# EAGLE board turbo_new (EAGLE 7.6.0)
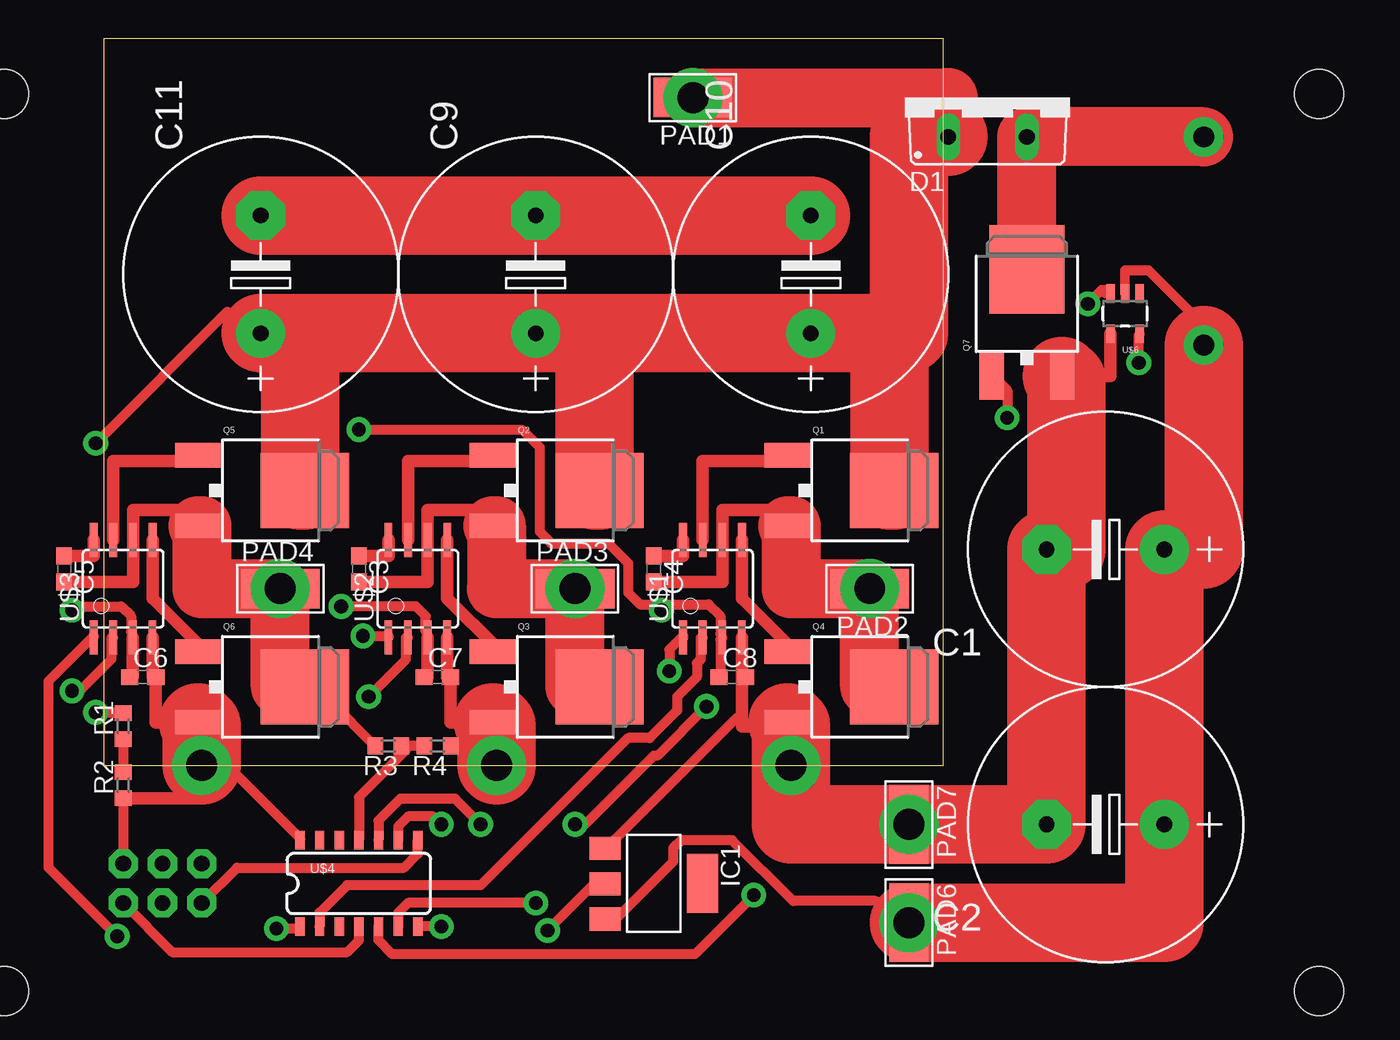
[diagram p0: board, top side]
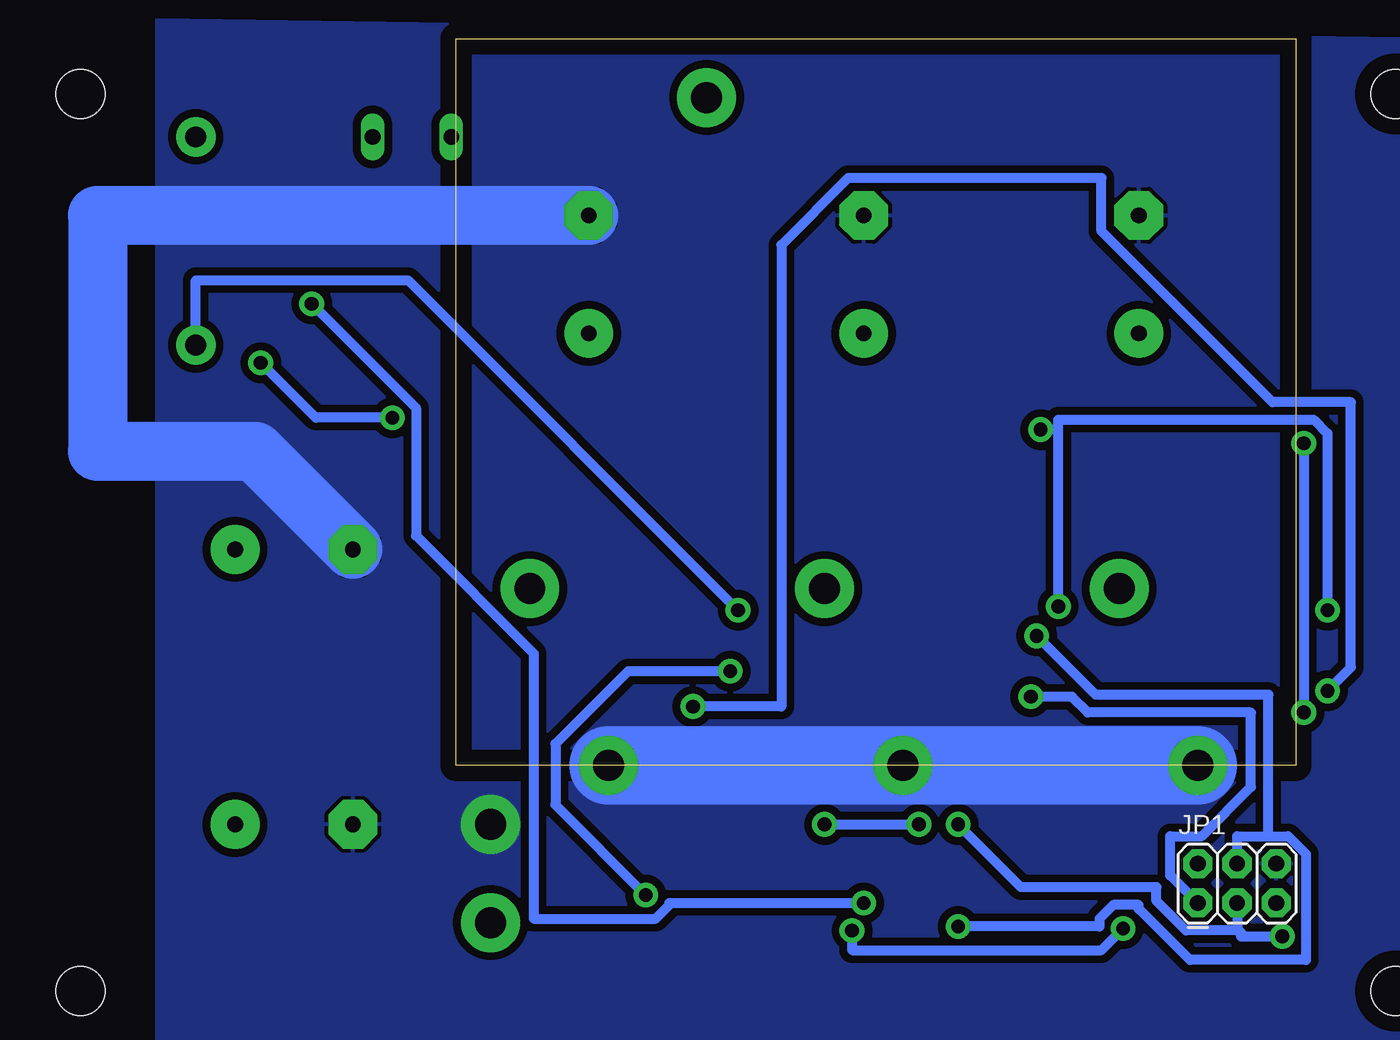
[diagram p1: board, bottom side, seen from below]

Size 54.28 x 46.98 mm. Coordinates in mm from the lower left corner, seen from the top.
Outline: 0,0 54.28,0 54.28,46.98 0,46.98 0,0
Copper layers (1*16): Top 0.035mm / dielectric 1.5mm / Bottom 0.035mm
Design rules "default *": minimum track width 20mil, minimum drill 35mil, track to track 20mil, track to pad 20mil, pad to pad 20mil, via to via 20mil, smd to smd 20mil, copper to edge 40mil, drill to drill 13mil, minimum pad ring 10mil, minimum via ring 8mil, stop-mask expansion 4mil, vias tented up to drill 0mil, thermal gap 10mil
Net classes: 0 default: width 0.635 mm
Holes 3.17 mm at -6.43,43.41 -6.43,-14.59 78.57,43.41 78.57,-14.59
vRestrict: area 12.1,-9.5 to 21,-5.7; area -1.3,8.9 to 3.8,14; area 17.8,8.9 to 22.9,14; area 36.8,8.9 to 41.9,14; area 45.7,14.6 to 52.1,21; area 26.7,14.6 to 33,21; area 26.7,1.9 to 33,8.3; area 45.7,1.9 to 52.1,8.3; area 7.6,1.9 to 14,8.3; area 33.7,-10.8 to 37.5,-4.4; area 64.8,28.6 to 67.3,29.8; area 56.5,26.7 to 62.9,33; 1 more areas

## Footprints (pad centres in the part's own frame; a part is rotated, then mirrored left to right if it is on the bottom)
E7,5-18 = drill 1.016 pad 3.15: + -3.81,0 | drill 1.016 pad 3.15 octagon: - 3.81,0
C0603 = smd 1.1 x 1: 1 -0.85,0; 2 0.85,0
TO220ACS = drill 1.016 long: A 2.54,-2.54; C -2.54,-2.54
SOT223 = smd 1.499 x 2.007: 1 -2.261,-3.15; 2 0.025,-3.15; 3 2.311,-3.15 | smd 3.81 x 2.007: 4 0,3.15
2X3 = drill 1.016 pad 1.88 octagon: 1 0,0; 2 0,2.54; 3 2.54,0; 4 2.54,2.54; 5 5.08,0; 6 5.08,2.54
5-2,5 = smd 2.54 x 5.08: 1 0,0
DPAK = smd 1.6 x 3: 1 -2.28,-5.31; 3 2.28,-5.31 | smd 4.826 x 5.715: 4 0,1.588
R0603 = smd 1 x 1.1: 1 -0.85,0; 2 0.85,0
SOIC8 = smd 0.5 x 2.2: 1 -1.905,-3.154; 2 -0.645,-3.154; 3 0.625,-3.154; 4 1.895,-3.154; 5 1.905,3.154; 6 0.635,3.154; 7 -0.635,3.154; 8 -1.905,3.154
SO14 = smd 0.6 x 1.2: 1 -3.81,-2.8; 2 -2.54,-2.8; 3 -1.27,-2.8; 4 0,-2.8; 5 1.27,-2.8; 6 2.54,-2.8; 7 3.81,-2.8; 8 3.81,2.8; 9 2.54,2.8; 10 1.27,2.8; 11 0,2.8; 12 -1.27,2.8; 13 -2.54,2.8; 14 -3.81,2.8
2310 = drill 1.346 pad 2.54: 1 0,0; 2 13.462,0
SOT23-5 = smd 0.55 x 1.2: 1 -0.95,-1.3; 2 0,-1.3; 3 0.95,-1.3; 4 0.95,1.3; 5 -0.95,1.3

## Placement (x,y rotation side)
C1  [E7,5-18]  64.77,13.97 180 top  (outside the outline)
C2  [E7,5-18]  64.77,-3.81 180 top  (outside the outline)
C3  0.1uf  [C0603]  16.51,12.7 270 top
C4  0.1uf  [C0603]  35.56,12.7 270 top
C5  0.1uf  [C0603]  -2.54,12.7 270 top
C6  0.1uf  [C0603]  2.54,5.71 0 top
C7  0.1uf  [C0603]  21.59,5.71 0 top
C8  0.1uf  [C0603]  40.64,5.71 0 top
C9  [E7,5-18]  27.94,31.75 90 top
C10  [E7,5-18]  45.72,31.75 90 top
C11  [E7,5-18]  10.16,31.75 90 top
D1  [TO220ACS]  57.15,43.18 0 top
IC1  REG1117  [SOT223]  35.56,-7.62 270 top  (outside the outline)
JP1  AVR_SPI_PRG_6PTH  [2X3]  6.35,-8.89 0 bottom  (outside the outline)
PAD1  [5-2,5]  38.1,43.18 90 top
PAD2  [5-2,5]  49.53,11.43 90 top
PAD3  [5-2,5]  30.48,11.43 270 top
PAD4  [5-2,5]  11.43,11.43 270 top
PAD6  [5-2,5]  52.07,-10.16 180 top  (outside the outline)
PAD7  [5-2,5]  52.07,-3.81 180 top  (outside the outline)
Q1  MOSFET-NCHANNELFDD8780  [DPAK]  49.53,17.78 270 top
Q2  MOSFET-NCHANNELFDD8780  [DPAK]  30.48,17.78 270 top
Q3  MOSFET-NCHANNELFDD8780  [DPAK]  30.48,5.08 270 top
Q4  MOSFET-NCHANNELFDD8780  [DPAK]  49.53,5.08 270 top
Q5  MOSFET-NCHANNELFDD8780  [DPAK]  11.43,17.78 270 top
Q6  MOSFET-NCHANNELFDD8780  [DPAK]  11.43,5.08 270 top
Q7  MOSFET-NCHANNELFDD8780  [DPAK]  59.69,30.48 0 top  (outside the outline)
R1  40k  [R0603]  1.27,2.54 90 top
R2  1k  [R0603]  1.27,-1.27 90 top
R3  20k  [R0603]  18.41,1.27 180 top
R4  1k  [R0603]  21.59,1.27 180 top
U$1  L6387  [SOIC8]  39.37,11.43 0 top
U$2  L6387  [SOIC8]  20.32,11.43 0 top
U$3  L6387  [SOIC8]  1.27,11.43 0 top
U$4  ATTINY84  [SO14]  16.51,-7.62 0 top  (outside the outline)
U$5  2310  [2310]  71.12,40.64 270 top  (outside the outline)
U$6  MCP1415  [SOT23-5]  66.04,29.21 180 top  (outside the outline)

## Library data of the parts
C1 C2 C9-C11 = adafruit
C3-C8 R1-R4 = rcl
D1 = diode
IC1 = burr-brown; MPN: REG1117; OC_FARNELL: 1097566; OC_NEWARK: 14P6981
JP1 = SparkFun-Connectors
PAD1-PAD4 PAD6 PAD7 = wirepad
Q1-Q7 = SparkFun-DiscreteSemi; PROD_ID: TRANS-09984
U$1-U$3 U$5 U$6 = TheLibrary
U$4 = SparkFun-DigitalIC; PROD_ID: IC-11285

## Nets
12V: C1.+ C2.+ C6.1 C7.1 C8.1 IC1.3 PAD6.1 U$1.3 U$2.3 U$3.3 U$5.2 U$6.2
48V: C9.+ C10.+ C11.+ D1.C PAD1.1 Q1.4 Q2.4 Q5.4 R1.2
A0: R1.1 R2.2
BOOST: U$4.6 U$6.3
EMF: C5.2 PAD4.1 Q5.3 Q6.4 R3.2 U$3.6
EMF_ADC: R3.1 R4.2 U$4.11
GND: C1.- C2.- C6.2 C7.2 C8.2 C9.- C10.- C11.- IC1.1 JP1.6 PAD7.1 Q3.3 Q4.3 Q6.3 Q7.3 R2.1 R4.1 U$1.4 U$2.4 U$3.4 U$4.14 U$6.4
N$1: C4.2 PAD2.1 Q1.3 Q4.4 U$1.6
N$2: C3.2 PAD3.1 Q2.3 Q3.4 U$2.6
N$3: Q3.1 U$2.5
N$4: Q4.1 U$1.5
N$5: Q1.1 U$1.7
N$6: IC1.2 U$4.1
N$7: C5.1 U$3.8
N$8: Q2.1 U$2.7
N$10: Q6.1 U$3.5
N$11: Q5.1 U$3.7
N$12: C3.1 U$2.8
N$13: C4.1 U$1.8
N$14: JP1.3 U$3.1 U$4.9
N$15: U$3.2 U$4.10
N$16: JP1.1 U$2.2 U$4.8
N$17: JP1.4 U$2.1 U$4.7
N$19: U$1.1 U$4.5
N$20: JP1.5 U$4.4
N$21: D1.A Q7.4 U$5.1
N$22: U$1.2 U$4.2
N$23: Q7.1 U$6.5

## Tracks (layer width: path | path; a pad name or v marks a point on that pad's centre or on a via)
12V  (via drill 0.89, 2 pad 3.81)
  Top 0.61: U$6.2 66.04,32
  Top 0.635: C8.1 39.88,5.71 39.88,8.13 40.01,8.25 U$1.3 39.88,8.51 39.88,9.65 39.12,10.41 36.07,10.41 | v-2.03,10.03 -1.78,10.29 1.14,10.29 1.78,9.65 1.78,8.64 U$3.3 | v15.37,10.29 20.19,10.29 20.83,9.65 20.83,8.64 U$2.3 | 36.07,10.41 34.67,10.41 33.91,11.18 33.91,13.08 32.64,14.35 28.96,14.35 28.19,15.11 28.19,20.57 27.05,21.72 v16.51,21.72 | 66.04,32 67.56,32 70.1,29.46 U$5.2 | IC1.3 32.51,-9.91 33.15,-9.91 36.83,-6.22 36.83,-5.33 37.34,-4.83 40.64,-4.83 44.58,-8.76 49.91,-8.76 PAD6.1 | v36.07,10.03 36.07,10.41
  Top 0.813: U$3.3 1.9,5.71 C6.1 | U$2.3 20.95,5.71 C7.1
  Top 5.08: PAD6.1 68.58,-10.16 C2.+ C1.+ 71.12,13.97 U$5.2
  Bottom 0.635: v-2.03,10.03 -2.03,21.46 -1.14,22.35 15.37,22.35 15.37,21.72 | v15.37,10.29 15.37,21.72 | 15.37,21.72 v16.51,21.72 | v36.07,10.03 57.4,31.37 71.12,31.37 U$5.2
  other vias: 52.07,-10.16
48V  (via drill 0.89, 2 pad 3.81)
  Top 0.635: v-0.51,3.43 1.27,3.43 R1.2 | v-0.51,20.83 8,29.34 C11.+
  Top 3.81: Q5.4 13.97,17.78 | PAD1.1 54.61,43.18 D1.C
  Top 5.08: 50.8,27.94 52.07,27.94 52.07,40.64 D1.C | 50.8,27.94 C10.+ 31.75,27.94 | C11.+ 12.7,27.94 | 12.7,27.94 C9.+ 31.75,27.94 | Q1.4 50.8,17.78 50.8,27.94 | Q2.4 31.75,17.78 31.75,27.94 | Q5.4 12.7,17.78 12.7,27.94
  Bottom 0.635: v-0.51,20.83 v-0.51,3.43
  other vias: 38.1,43.18
A0
  Top 0.635: R1.1 R2.2
BOOST  (via drill 0.89)
  Top 0.61: U$6.3 64.77,30.51 64.77,30.73
  Top 0.635: U$4.6 19.05,-9.53 19.68,-8.89 v27.94,-8.89 | v63.63,29.84 64.52,30.73 64.77,30.73
  Bottom 0.635: v27.94,-8.89 40.51,-8.89 40.51,-9.02 41.4,-9.91 49.28,-9.91 49.28,7.24 56.9,14.86 56.9,23.11 v63.63,29.84
EMF  (via drill 2 pad 3.81)
  Top 0.635: R3.2 17.53,1.27 14.61,4.19 Q6.4
  Top 0.813: Q5.3 6.12,16.51 1.91,16.51 U$3.6 1.91,11.85 C5.2
  Top 3.81: Q6.4 11.43,5.08 PAD4.1 6.35,11.43 6.35,15.5 Q5.3
  other vias: 11.43,11.43
EMF_ADC
  Top 0.635: R4.2 R3.1 19.56,1.02 16.51,-2.03 U$4.11
GND  (via drill 2 pad 3.81)
  Top 0.635: R4.1 25.4,1.27 | U$4.14 12.7,-4.7 8.76,-0.76 v6.35,0 | IC1.1 32.51,-5.33 40.89,3.05 41.28,3.05 | R2.1 JP1.6
  Top 0.813: U$3.4 3.17,5.71 C6.2 3.39,2.8 Q6.3 | U$2.4 22.21,5.71 C7.2 22.44,2.8 Q3.3 | U$1.4 41.27,5.71 C8.2 41.28,5.71 41.28,3.05 41.28,2.54 44.22,2.54 Q4.3 | R2.1 6.35,-2.12 v6.35,0 | Q7.3 65.09,25.17 U$6.4
  Top 5.08: C10.- C9.- C11.- | Q7.3 62.23,24.91 62.23,13.97 C1.- C2.- PAD7.1 44.45,-3.81 v44.45,0 44.45,2.57 Q4.3 | Q3.3 25.4,2.57 25.4,1.27 v25.4,0 | Q6.3 6.35,2.57 v6.35,0
  Bottom 3.81: C10.- 77.47,35.56 77.47,20.32 67.31,20.32 C1.-
  Bottom 5.08: v44.45,0 v25.4,0 v6.35,0
  other vias: 52.07,-3.81
  pour Bottom (isolate 0.025, rank 6): -8.89,46.99 -8.89,-19.05 73.66,-17.78 73.66,48.26
N$1  (via drill 2 pad 3.81)
  Top 0.813: C4.2 40.01,11.85 U$1.6 40.01,16.51 44.45,16.51 44.45,15.5
  Top 3.81: Q4.4 49.53,5.08 PAD2.1 44.45,11.43 44.45,15.5 Q1.3
  other vias: 49.53,11.43
N$2  (via drill 2 pad 3.81)
  Top 0.813: Q2.3 25.17,16.51 20.95,16.51 U$2.6 20.95,11.85 C3.2
  Top 3.81: Q3.4 30.48,5.08 PAD3.1 25.4,11.43 25.4,15.5 Q2.3
  other vias: 30.48,11.43
N$3
  Top 0.813: U$2.5 22.22,10.8 25.4,7.62 25.4,7.59 Q3.1
N$4
  Top 0.813: U$1.5 41.28,10.8 44.45,7.62 44.45,7.59 Q4.1
N$5
  Top 0.813: U$1.7 38.73,19.69 44.22,19.69 Q1.1
N$6  (via drill 0.89)
  Top 0.635: v11.18,-10.54 12.7,-10.54 U$4.1 | v28.7,-10.67 31.62,-7.75 32.39,-7.75 IC1.2
  Bottom 0.635: v11.18,-10.54 12.57,-11.94 28.7,-11.94 v28.7,-10.67
N$7
  Top 0.813: C5.1 -0.63,13.55 U$3.8
N$8
  Top 0.813: U$2.7 19.68,19.69 25.4,19.69 25.4,20.32 25.17,20.32 Q2.1
N$10
  Top 0.813: U$3.5 3.17,10.8 6.35,7.62 6.35,7.59 Q6.1
N$11
  Top 0.813: U$3.7 0.64,19.69 6.12,19.69 Q5.1
N$12
  Top 0.813: C3.1 18.41,13.55 U$2.8
N$13
  Top 0.813: C4.1 37.47,13.55 U$1.8
N$14  (via drill 0.89)
  Top 0.635: U$4.9 19.05,-3.94 19.68,-3.3 21.34,-3.3 v21.84,-3.81 | v0.89,-11.05 -3.56,-6.6 -3.56,5.46 -0.63,8.38 U$3.1
  Bottom 0.635: v21.84,-3.81 17.78,-7.87 9.02,-7.87 9.02,-8.76 7.11,-10.67 3.81,-10.67 | JP1.3 3.81,-10.67 | v0.89,-11.05 3.56,-11.05 3.56,-10.79 3.81,-10.67
N$15  (via drill 0.89)
  Top 0.635: U$4.10 17.78,-3.56 19.18,-2.16 22.73,-2.16 v24.38,-3.81 | v30.48,-3.81 31.11,-3.81 35.56,0.64 35.81,0.64 v38.99,3.81 | v-2.03,4.83 -1.52,4.83 0.51,6.86 0.51,8.25 U$3.2
  Bottom 0.635: v30.48,-3.81 v24.38,-3.81 | v38.99,3.81 33.27,3.81 33.27,33.66 28.96,37.97 12.57,37.97 12.57,34.54 1.52,23.49 -3.56,23.49 -3.56,6.35 v-2.03,4.83
N$16  (via drill 0.89)
  Top 0.635: U$4.8 20.32,-5.71 19.43,-6.6 8.64,-6.6 JP1.1 | v17.14,4.45 19.56,6.86 19.56,8.25 U$2.2
  Bottom 0.635: v17.14,4.45 14.48,4.45 13.46,3.43 2.92,3.43 2.92,-1.4 6.1,-4.57 8.13,-4.57 8.13,-7.11 JP1.1
N$17  (via drill 0.89)
  Top 0.635: v21.84,-10.41 U$4.7 | v16.76,8.38 18.41,8.38 U$2.1
  Bottom 0.635: v21.84,-10.41 12.7,-10.41 12.7,-9.91 11.81,-9.02 10.16,-9.02 10.16,-9.27 6.86,-12.57 -0.63,-12.57 -0.63,-5.71 0.51,-4.57 1.78,-4.57 | 1.78,-4.57 3.81,-4.57 JP1.4 | v16.76,8.38 12.95,4.57 1.78,4.57 1.78,-4.57
N$19  (via drill 0.89)
  Top 0.635: U$4.5 17.78,-11.3 18.67,-12.19 38.23,-12.19 v42.04,-8.38 | v36.58,6.1 36.58,7.49 37.47,8.38 U$1.1
  Bottom 0.635: v42.04,-8.38 47.88,-2.54 47.88,1.4 43.18,6.1 v36.58,6.1
N$20
  Top 0.635: U$4.4 16.51,-11.3 15.75,-12.06 4.44,-12.06 JP1.5
N$21
  Top 3.81: Q7.4 D1.A U$5.1
N$22
  Top 0.635: U$4.2 13.97,-9.53 15.75,-7.75 24.38,-7.75 33.91,1.78 35.31,1.78 37.08,3.56 37.08,4.45 38.35,5.71 38.35,6.6 38.61,6.86 38.61,8.25 U$1.2
N$23  (via drill 0.89)
  Top 0.635: v66.93,26.03 66.93,27.81 U$6.5 | v58.42,22.48 58.42,24.26 57.53,25.15 Q7.1
  Bottom 0.635: v66.93,26.03 63.37,22.48 v58.42,22.48